# Altium PCB ap-pam-VX.PcbDoc (part 1 of 2)
Units mm, origin at the board's own origin, x right, y up, seen from the top; angles counter-clockwise.
Board outline 190.5 x 50.8 mm, 2 copper layers (Top Layer, Bottom Layer), stack 0.579 mm thick; 74 components, 43 nets, 478 pads, 486 vias.
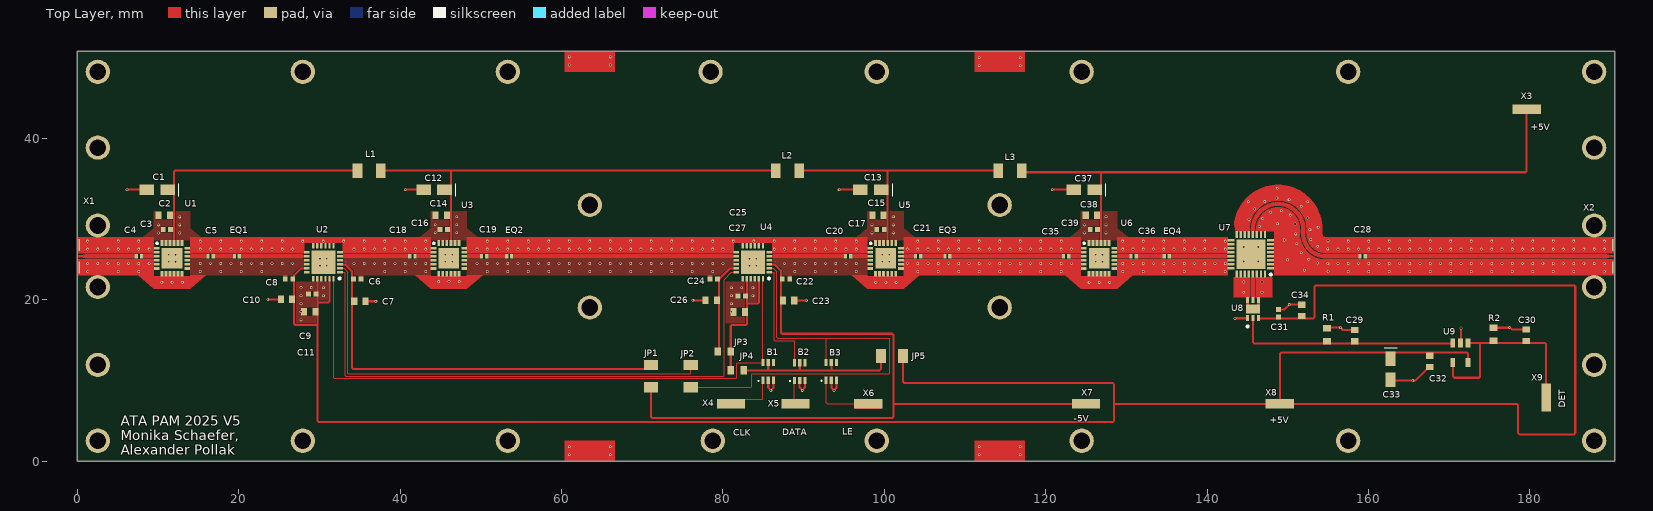
[diagram p0: Top Layer view]
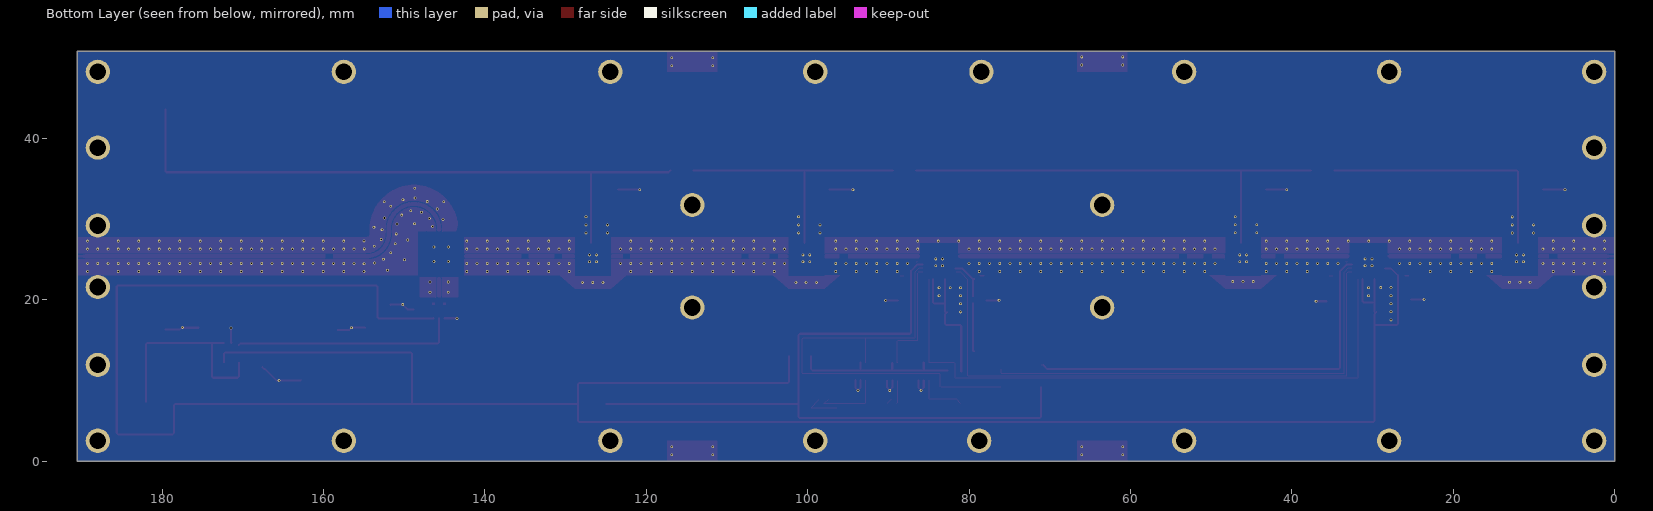
[diagram p1: Bottom Layer view, seen from below]
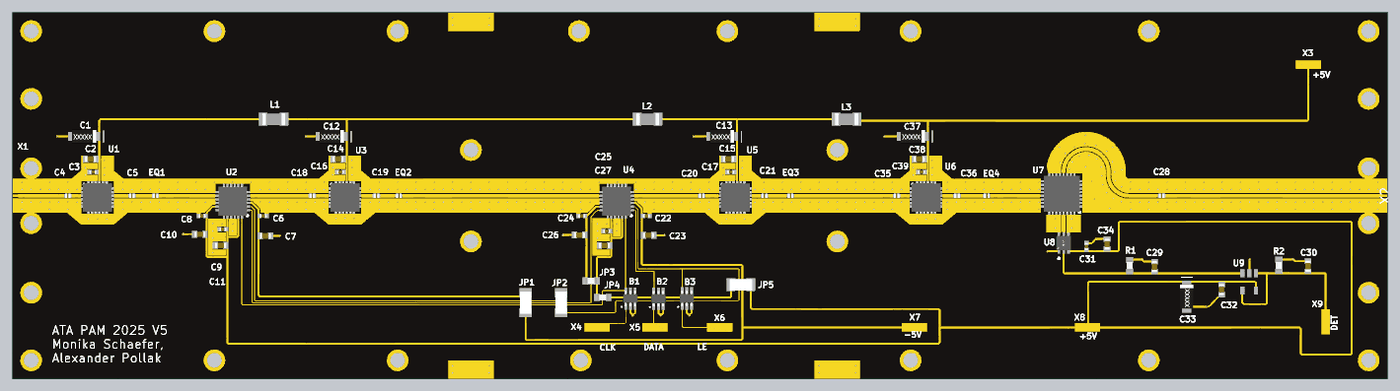
[diagram p2: 3D render of the assembled board from above, using the file's embedded part models]

## Layer stack, top to bottom
Top Layer: signal copper 0.0356
Dielectric 1: dielectric 0.508, Rogers 4350B, Dk 3.48
Bottom Layer: signal copper 0.0356

## Board outline
0,0 190.5,0 190.5,50.8 0,50.8

## Design rules (kind name [scope] priority, off if disabled: settings)
Clearance Clearance_1 [All] p1: gap=0.1 ignorepadtopadclearanceinfootprint=FALSE except(0.2: Via-Hole)
HoleSize [All] p1: absolutevalues=TRUE maxlimit=2.54 minlimit=0.2 maxpercent=80.000 minpercent=20.000
HoleToHoleClearance [All] p1: gap=0.2 allowstackedmicrovias=TRUE
MinimumSolderMaskSliver [All] p1: minsoldermaskwidth=0.1
PolygonConnect [All] p1: connectstyle=Direct reliefconductorwidth=0.254 reliefentries=4 polygonreliefangle="90 Angle" airgapwidth=0.254
RoutingVias [All] p1: holewidth=0.711 width=1.27 viastyle="Through Hole" minholewidth=0.2 minwidth=0.35 maxholewidth=0.711 maxwidth=1.27
SilkToSolderMaskClearance [IsPad] p1: minsilkscreentomaskgap=0.15 clearancetoexposedcopper=TRUE
SolderMaskExpansion [All] p1: expansion=0.102 istentingtop=FALSE
SupplyNets "Schematic Supply Nets" [InNet('GND')] p1: voltage=0.000
Width [All] p1: maxlimit=3 minlimit=0.1 preferedwidth=0.16
26 further rules are at their usual default settings.

## Components (designator, comment, footprint, x,y, rotation, side; value= is the part's Value field where it differs from the comment)
B1 "SN74LVC2G34MDCKREP" BUF_SN74LVC2G34MDCKREP 85.613,11.127 r90 top
B2 "SN74LVC2G34MDCKREP" BUF_SN74LVC2G34MDCKREP 89.508,11.103 r90 top
B3 "SN74LVC2G34MDCKREP" BUF_SN74LVC2G34MDCKREP 93.435,11.134 r90 top
C1 "4.7 uF" C4_7UF 9.881,33.645 r180 top value=4.7uF
C2 "1000 pF" C1000PF 10.786,30.49 r180 top value=1nF
C3 "100 pF" C100PF 11.101,28.71 r180 top
C4 "10nF" C10NF 7.62,25.4 r0 top
C5 "10nF" C10NF 16.51,25.4 r0 top
C6 "100 pF" C100PF 34.699,22.606 r0 top
C7 "1000 pF" C1000PF 35.013,19.823 r0 top value=1nF
C8 "100 pF" C100PF 26.233,22.602 r180 top
C9 "100 pF" C100PF 29.115,20.74 r180 top
C10 "1000 pF" C1000PF 25.922,20.048 r180 top value=1nF
C11 "1000 pF" C1000PF 28.8,18.514 r180 top value=1nF
C12 "4.7 uF" C4_7UF 44.2,33.645 r180 top value=4.7uF
C13 "4.7 uF" C4_7UF 98.34,33.645 r180 top value=4.7uF
C14 "1000 pF" C1000PF 45.087,30.49 r180 top value=1nF
C15 "1000 pF" C1000PF 99.212,30.49 r180 top value=1nF
C16 "100 pF" C100PF 45.402,28.71 r180 top
C17 "100 pF" C100PF 99.527,28.71 r180 top
C18 "10nF" C10NF 41.504,25.4 r0 top
C19 "10nF" C10NF 50.402,25.4 r0 top
C20 "10nF" C10NF 95.509,25.4 r0 top
C21 "10nF" C10NF 104.198,25.4 r0 top
C22 "100 pF" C100PF 87.819,22.603 r0 top
C23 "1000 pF" C1000PF 88.14,19.914 r0 top value=1nF
C24 "100 pF" C100PF 78.867,22.606 r180 top
C25 "100 pF" C100PF 82.328,20.488 r180 top
C26 "1000 pF" C1000PF 78.561,19.942 r180 top value=1nF
C27 "1000 pF" C1000PF 82.012,18.497 r180 top value=1nF
C28 "10nF" C10NF 159.268,25.4 r0 top
C29 "100nF" C1000PF__C100NF 158.277,15.569 r90 top
C30 "100nF" C1000PF__C100NF 179.551,15.607 r90 top
C31 "100 pF" C100PF 148.826,18.351 r270 top
C32 "100nF" C1000PF__C100NF 167.581,12.37 r90 top
C33 "4.7 uF" C4_7UF 162.725,11.392 r270 top value=4.7uF
C34 "100nF" C1000PF__C100NF 151.701,18.69 r270 top
C35 "10nF" C10NF 122.527,25.4 r0 top
C36 "10nF" C10NF 130.89,25.4 r0 top
C37 "4.7 uF" C4_7UF 124.772,33.645 r180 top value=4.7uF
C38 "1000 pF" C1000PF__C100NF 125.657,30.49 r180 top value=1nF
C39 "100 pF" C100PF 125.971,28.71 r180 top
EQ1 "AEQ05472-10" EQ_AEQ05472 19.767,25.4 r0 top
EQ2 "AEQ05472-10" EQ_AEQ05472 53.507,25.4 r0 top
EQ3 "AEQ05472-10" EQ_AEQ05472 107.809,25.4 r0 top
EQ4 "AEQ05472-10" EQ_AEQ05472 134.998,25.4 r0 top
JP1 "MCA12060Z0000ZP500" JP_MCA12060Z0000ZP500 71.084,10.549 r90 top value=0R
JP2 "MCA12060Z0000ZP500" JP_MCA12060Z0000ZP500 76.006,10.549 r90 top value=0R
JP3 "MCT06030Z0000ZP500" JP_small_MCT06030Z0000ZP500 80.162,13.574 r180 top value=0R
JP4 "MCT06030Z0000ZP500" JP_small_MCT06030Z0000ZP500 81.779,11.276 r180 top value=0R
JP5 "MCA12060Z0000ZP500" JP_MCA12060Z0000ZP500 100.943,13.039 r0 top value=0R
L1 "HZ1206E152R-10" FB_HZ1206E152R-10 36.166,36.025 r0 top
L2 "HZ1206E152R-10" FB_HZ1206E152R-10 88.006,36.025 r0 top
L3 "HZ1206E152R-10" FB_HZ1206E152R-10 115.579,36.025 r0 top
R1 "1kOhm" JP_R_MCT06030Z0000ZP500 154.827,15.694 r90 top value=1kR
R2 "1kOhm" JP_R_MCT06030Z0000ZP500 175.506,15.74 r90 top value=1kR
U1 "MML098GQ4A" AMP_MML098GQ4A 11.735,25.15 r0 top
U2 "HMC1018ALP4E" ATT_HMC101018ALPE 30.499,24.65 r180 top
U3 "MML098GQ4A" AMP_MML098GQ4A 46.038,25.15 r0 top
U4 "HMC1018ALP4E" ATT_HMC101018ALPE 83.711,24.65 r180 top
U5 "MML098GQ4A" AMP_MML098GQ4A 100.163,25.15 r0 top
U6 "MML098GQ4A" AMP_MML098GQ4A 126.607,25.15 r0 top
U7 "PS_EP2RKU+" PS_EP2RKU+ 145.42,25.65 r180 top
U8 "ADL6010" DET_ADL6010ACPZN-R2 145.67,18.856 r90 top
U9 "AD8065" OPAMP_AD8065ARTZ-REEL7 171.389,13.447 r270 top
X1 "CPW Solder Pad" "CPW EDGE CONNECTOR" 0.25,25.4 r90 top
X2 "CPW Solder Pad" "CPW EDGE CONNECTOR" 190.25,25.4 r270 top
X3 "Solder Pad" "SOLDER PAD" 179.597,43.6 r90 top
X4 "Solder Pad" "SOLDER PAD" 81,7.144 r90 top
X5 "Solder Pad" "SOLDER PAD" 89,7.144 r90 top
X6 "Solder Pad" "SOLDER PAD" 98,7.144 r90 top
X7 "Solder Pad" "SOLDER PAD" 125,7.144 r90 top
X8 "Solder Pad" "SOLDER PAD" 149,7.144 r90 top
X9 "Solder Pad" "SOLDER PAD" 182.007,7.9 r0 top

## Footprints (in the part's own frame and the unit in brackets; to place one, negate y for a bottom-side part, rotate by r counter-clockwise, add the part's x,y. Pads: shape width x height; smd on the part's side, far side on the other; paste and mask are expansions set on the pad)
AMP_MML098GQ4A [mm]
  rect 0.7x0.35 smd: 1(-1.9,1.25) 2(-1.9,0.75) 3(-1.9,0.25) 4(-1.9,-0.25) 5(-1.9,-0.75) 6(-1.9,-1.25) 13(1.9,-1.25) 14(1.9,-0.75) 15(1.9,-0.25) 16(1.9,0.25) 17(1.9,0.75) 18(1.9,1.25)
  rect 0.7x0.35 on Top Paste: 1(-1.9,1.25) 2(-1.9,0.75) 3(-1.9,0.25) 4(-1.9,-0.25) 5(-1.9,-0.75) 6(-1.9,-1.25) 13(1.9,-1.25) 14(1.9,-0.75) 15(1.9,-0.25) 16(1.9,0.25) 17(1.9,0.75) 18(1.9,1.25)
  rect 0.35x0.7 smd: 7(-1.25,-1.9) 8(-0.75,-1.9) 9(-0.25,-1.9) 10(0.25,-1.9) 11(0.75,-1.9) 12(1.25,-1.9) 19(1.25,1.9) 20(0.75,1.9) 21(0.25,1.9) 22(-0.25,1.9) 23(-0.75,1.9) 24(-1.25,1.9)
  rect 0.35x0.7 on Top Paste: 7(-1.25,-1.9) 8(-0.75,-1.9) 9(-0.25,-1.9) 10(0.25,-1.9) 11(0.75,-1.9) 12(1.25,-1.9) 19(1.25,1.9) 20(0.75,1.9) 21(0.25,1.9) 22(-0.25,1.9) 23(-0.75,1.9) 24(-1.25,1.9)
  rect 2.55x2.55 smd: 25(0,0)
  rect 2.5x2.5 on Top Paste: 25(0,0)
  silkscreen extent -1.96,1.74 -1.76,1.94, body extent -2.05,-2.05 2.05,2.05, height 1.05
ATT_HMC101018ALPE [mm]
  rect 0.7x0.3 smd: 1(-2.05,1.25) 2(-2.05,0.75) 3(-2.05,0.25) 4(-2.05,-0.25) 5(-2.05,-0.75) 6(-2.05,-1.25) 13(2.05,-1.25) 14(2.05,-0.75) 15(2.05,-0.25) 16(2.05,0.25) 17(2.05,0.75) 18(2.05,1.25)
  rect 0.3x0.7 smd: 7(-1.25,-2.05) 8(-0.75,-2.05) 9(-0.25,-2.05) 10(0.25,-2.05) 11(0.75,-2.05) 12(1.25,-2.05) 19(1.25,2.05) 20(0.75,2.05) 21(0.25,2.05) 22(-0.25,2.05) 23(-0.75,2.05) 24(-1.25,2.05)
  rect 2.95x2.95 smd: 25(0,0)
  silkscreen extent -2.13,1.88 -1.88,2.12, body extent -2.05,-2.05 2.05,2.05, height 1
BUF_SN74LVC2G34MDCKREP [mm]
  rect 0.9x0.4 smd: 1(-1.1,0.65) 2(-1.1,0) 3(-1.1,-0.65) 4(1.1,-0.65) 5(1.1,0) 6(1.1,0.65)
  rect 0.9x0.4 on Top Paste: 1(-1.1,0.65) 2(-1.1,0) 3(-1.1,-0.65) 4(1.1,-0.65) 5(1.1,0) 6(1.1,0.65)
  silkscreen extent -1.16,1.2 -1.16,1.21, body extent -1.05,-1 1.05,1, height 1
C4_7UF [mm]
  rect 1.8x1.25 smd: 1(-1.3,0) 2(1.3,0)
  silkscreen extent -2.69,-0.76 -2.69,0.82, body extent -1.7,-0.95 1.7,0.95, height 1.84
C10NF [mm]
  rect 0.4x0.538 smd: 1(-0.325,0) 2(0.325,0)
  body extent -0.4,-0.3 0.4,0.3, height 0.14
C100PF [mm]
  rect 0.6x0.62 smd: 1(-0.46,0) 2(0.46,0)
  body extent -0.5,-0.25 0.5,0.25, height 0.55
C1000PF [mm]
  rect 0.75x0.94 smd: 1(-0.7,0) 2(0.7,0)
  body extent -0.8,-0.4 0.8,0.4, height 0.9
C1000PF__C100NF [mm]
  rect 0.75x0.94 smd: 1(-0.7,0) 2(0.7,0)
  body extent -0.8,-0.4 0.8,0.4, height 0.9
"CPW EDGE CONNECTOR" [mm]
  rect 0.1x0.2 smd paste-2539.97: 1(0,0)
  rect 1.5x0.2 smd paste-2539.97: 2(-1.4,0) 3(1.4,0)
  Top Layer region: -2.383,0.25 -0.361,0.25 -0.361,-0.25 -0.383,-0.75 -2.383,-0.75
  Top Layer region: 2.383,0.25 0.361,0.25 0.361,-0.25 0.383,-0.75 2.383,-0.75
  Top Layer region: -0.15,0.25 0.15,0.25 0.15,-0.25 0.269,-0.75 -0.269,-0.75 -0.15,-0.25
DET_ADL6010ACPZN-R2 [mm]
  rect 0.73x0.35 smd paste+0 mask+0: 1(-1.115,0.675) 2(-1.115,0) 3(-1.115,-0.675) 4(1.115,-0.675) 5(1.115,0) 6(1.115,0.675)
  rect 1.1x1.7 smd paste+0 mask+0: 7(0,0)
  Top Layer region: 0.516,0.5 0.814,0.5 0.814,0.85 0.516,0.85
  Top Layer region: 0.502,-0.85 0.793,-0.85 0.793,-0.5 0.502,-0.5
  silkscreen extent -2.27,0.52 -2.03,0.77, body extent -1.68,-1.15 1.68,1.15, height 0.25
EQ_AEQ05472 [mm]
  rect 0.4x0.538 smd: 1(-0.3,0) 2(0.3,0)
  body extent -0.4,-0.3 0.4,0.3, height 0.14
FB_HZ1206E152R-10 [mm]
  rect 1.2x1.8 smd: 1(-1.45,0) 2(1.45,0)
  body extent -1.6,-0.8 1.6,0.8, height 1.3
JP_MCA12060Z0000ZP500 [mm]
  rect 1.256x1.758 smd paste+0 mask+0: 1(-1.376,0) 2(1.376,0)
  body extent -2.26,-1.13 2.25,1.13, height 0.25
JP_R_MCT06030Z0000ZP500 [mm]
  rect 0.8x1 smd: 1(-0.8,0) 2(0.8,0)
  body extent -0.77,-0.43 0.78,0.42, height 0.46
JP_small_MCT06030Z0000ZP500 [mm]
  rect 0.8x1 smd: 1(-0.8,0) 2(0.8,0)
  body extent -0.77,-0.43 0.78,0.42, height 0.46
OPAMP_AD8065ARTZ-REEL7 [mm] "SOT-23, 5-Leads, Body 2.9x1.6mm, Pitch 0.95mm, IPC Medium Density"
  rect 1.1x0.6 smd: 1(-1.2,0.95) 2(-1.2,0) 3(-1.2,-0.95) 4(1.2,-0.95) 5(1.2,0.95)
  body extent -0.85,-1.5 0.85,1.5, height 1.45
PS_EP2RKU+ [mm]
  rect 0.85x0.3 smd: 1(-2.45,1.75) 2(-2.45,1.25) 3(-2.45,0.75) 4(-2.45,0.25) 5(-2.45,-0.25) 6(-2.45,-0.75) 7(-2.45,-1.25) 8(-2.45,-1.75) 17(2.45,-1.75) 18(2.45,-1.25) 19(2.45,-0.75) 20(2.45,-0.25) 21(2.45,0.25) 22(2.45,0.75) 23(2.45,1.25) 24(2.45,1.75)
  rect 0.3x0.85 smd: 9(-1.75,-2.45) 10(-1.25,-2.45) 11(-0.75,-2.45) 12(-0.25,-2.45) 13(0.25,-2.45) 14(0.75,-2.45) 15(1.25,-2.45) 16(1.75,-2.45) 25(1.75,2.45) 26(1.25,2.45) 27(0.75,2.45) 28(0.25,2.45) 29(-0.25,2.45) 30(-0.75,2.45) 31(-1.25,2.45) 32(-1.75,2.45)
  rect 3.6x3.6 smd: 33(0,0)
  silkscreen extent -2.59,2.4 -2.34,2.65, body extent -2.55,-2.55 2.55,2.55, height 1
"SOLDER PAD" [mm]
  rect 1.2x3.5 smd paste-2539.97: 1(0,0)

## Part data
B1 B2 B3: library part Buf_SN74LVC2G34MDCKREP, "Enhanced Product Dual Buffer Gate", Manufacturer_Name="Texas Instruments", Mouser Part Number=595-SN74L2G34MDCKREP, Datasheet Link=https://datasheet.datasheetarchive.com/originals/distributors/Datasheets-SFU2/DSASFU100028688.pdf, Geometry.Height=1.1mm, Manufacturer Part Number=SN74LVC2G34MDCKREP, Mouser Price/Stock=https://www.mouser.co.uk/ProductDetail/Texas-Instruments/SN74LVC2G34MDCKREP?qs=l4wu3mKjyfmQ87%252BWHVxJDg%3D%3D
C1 C12 C13 C33 C37: library part C7_4uF_TH3A475K010C2900, "Tantalum Capacitor, Polarized, Tantalum (dry/solid), 10V, 10% +Tol, 10% -Tol, 4.7uF, Surface Mount, 1306", Capacitor Type=Tantalum, Case/Package=1206, ESR (Equivalent Series Resistance)=2.9R, Leakage Current=500nA, Manufacturer="Vishay Sprague", Manufacturer Part Number=TH3A475K010C2900, Max Operating Temperature=150°C, Min Operating Temperature=-55°C, Package Shape=Rectangular, Package Style=SMTMeter, Rated DC Voltage (URdc)=10V, Ripple Current=160mA, Supplier Part Number=4924098, Tolerance  (fill in as +-)=10%, Category="Tantalum Capacitors", ComponentLink1Description=https://datasheet.ciiva.com:443/pdfs/VipMasterIC/IC/VISH/VISH-S-A0010085390/VISH-S-A0010085390-1.pdf?src-supplier=IHS+Markit, ComponentLink1URL=https://datasheet.ciiva.com:443/pdfs/VipMasterIC/IC/VISH/VISH-S-A0010085390/VISH-S-A0010085390-1.pdf?src-supplier=IHS+Markit, ComponentLink2Description=https://datasheet.ciiva.com/268/th3-268785.pdf?src-supplier=Digikey, ComponentLink2URL=https://datasheet.ciiva.com/268/th3-268785.pdf?src-supplier=Digikey, ComponentLink3Description=https://datasheet.ciiva.com/16360/th3-16360891.pdf?src-supplier=Future+Electronics, ComponentLink3URL=https://datasheet.ciiva.com/16360/th3-16360891.pdf?src-supplier=Future+Electronics, Dielectric Material=Tantalum, Height=1.6mm, JESD-609 Code=e3, Length=3.2mm, Mounting Technology="Surface Mount", Packaging="Tape and Reel", Pins=2, Polarity=Polarized, Pricing="2000=0.178, 4000=0.175, 6000=0.173, 8000=0.171, 10000=0.166 (USD)", Reach SVHC Compliant=Yes, Reference Standard=AEC-Q200, RoHS=Yes, RoHS Compliant=Yes, Stock=2000, Supplier="Future Electronics", Tan Delta=0.06, Terminal Finish=Tin, Termination="J BEND", Tolerance (fill in as +-)=10%, Width=1.6mm
C2 C7 C10 C11 C14 C15 C23 C26 C27: library part GCM1885C1H102FA16D, "Ceramic Capacitor, Multilayer, Ceramic, 50V, 1% +Tol, 1% -Tol, C0G, 30ppm/Cel TC, 0.001uF, Surface Mount, 0603", Capacitor Type=Ceramic, Case/Package=0603, Manufacturer=Murata, Max Operating Temperature=125°C, Min Operating Temperature=-55°C, Package Shape=Rectangular, Rated DC Voltage (URdc)=50V, Supplier Part Number=81-GCM1885C1H102FA6D, Temperature Characteristics Code=C0G, Tolerance  (fill in as +-)=1%, Category="Ceramic Capacitors", ComponentLink1Description=https://datasheet.ciiva.com:443/pdfs/VipMasterIC/IC/MURE/MURE-S-A0004370842/MURE-S-A0004372260-1.pdf?src-supplier=IHS+Markit, ComponentLink1URL=https://datasheet.ciiva.com:443/pdfs/VipMasterIC/IC/MURE/MURE-S-A0004370842/MURE-S-A0004372260-1.pdf?src-supplier=IHS+Markit, Dielectric Material=Ceramic, Manufacturer Part Number=GCM1885C1H102FA16D, Mounting Technology="Surface Mount", Multilayer=Yes, Packaging="Tape and Reel", Pins=2, Pricing="1=0.35, 10=0.229, 50=0.229, 100=0.138, 1000=0.092, 10000=0.074 (USD)", Reach SVHC Compliant=Yes, Reference Standard=AEC-Q200, RoHS=Yes, RoHS Compliant=Yes, Stock=27229, Supplier=Mouser, Termination=Wraparound, Tolerance (fill in as +-)=1%
C3 C6 C8 C9 C16 C17 C22 C24 C25: library part GRM1555C2A101FA01D, "Multilayer Ceramic Capacitors MLCC - SMD/SMT 100 pF 100 VDC 1% 0402 C0G (NP0)", Manufacturer=Murata, Supplier Part Number=81-GRM1555C2A11FA1D, Manufacturer Part Number=GRM1555C2A101FA01D, Pricing="1=0.18, 10=0.119, 50=0.119, 100=0.06, 1000=0.039, 10000=0.035 (USD)", RoHS=No, Stock=21646, Supplier=Mouser
C4 C5 C18 C19 C20 C21 C28 C35 C36: library part C10nF_939113733510, Manufacturer=Murata, Manufacturer Part Number=939113733510, Supplier Part Number=961-939113733510, Pricing="1000=3.63, 10000=3.49 (USD)", RoHS=No, Stock=402, Supplier=Mouser
C29 C30 C32 C34: library part C100nF_GCM188R71C104KA37J, "Ceramic Capacitor, Multilayer, Ceramic, 16V, 10% +Tol, 10% -Tol, X7R, 15% TC, 0.1uF, Surface Mount, 0603", Capacitor Type=Ceramic, Case/Package=0603, Manufacturer=Murata, Manufacturer Part Number=GCM188R71C104KA37J, Max Operating Temperature=125°C, Min Operating Temperature=-55°C, Package Shape=Rectangular, Package Style=SMTMeter, Rated DC Voltage (URdc)=16V, Supplier Part Number=81-GCM188R71C104KA7J, Temperature Characteristics Code=X7R, Tolerance  (fill in as +-)=10%, Category="Ceramic Capacitors", ComponentLink1Description=https://datasheet.ciiva.com:443/pdfs/VipMasterIC/IC/MURE/MURE-S-A0004370842/MURE-S-A0004371613-1.pdf?src-supplier=IHS+Markit, ComponentLink1URL=https://datasheet.ciiva.com:443/pdfs/VipMasterIC/IC/MURE/MURE-S-A0004370842/MURE-S-A0004371613-1.pdf?src-supplier=IHS+Markit, ComponentLink2Description=https://datasheet.ciiva.com/18183/getdatasheetpartid-140967-18183600.pdf?src-supplier=Verical, ComponentLink2URL=https://datasheet.ciiva.com/18183/getdatasheetpartid-140967-18183600.pdf?src-supplier=Verical, ComponentLink3Description=https://datasheet.ciiva.com/29540/product-29540843.pdf?src-supplier=Digikey, ComponentLink3URL=https://datasheet.ciiva.com/29540/product-29540843.pdf?src-supplier=Digikey, ComponentLink4Description=https://datasheet.ciiva.com/29540/product-29540844.pdf?src-supplier=Digikey, ComponentLink4URL=https://datasheet.ciiva.com/29540/product-29540844.pdf?src-supplier=Digikey, ComponentLink5Description=https://datasheet.ciiva.com/29540/product-29540842.pdf?src-supplier=Digikey, ComponentLink5URL=https://datasheet.ciiva.com/29540/product-29540842.pdf?src-supplier=Digikey, Dielectric Material=Ceramic, Height=0.9mm, JESD-609 Code=e3, Length=1.6mm, Mounting Technology="Surface Mount", Multilayer=Yes, Packaging="Tape and Reel", Pins=2, Pricing="1=0.17, 10=0.097, 50=0.097, 100=0.063, 1000=0.044, 10000=0.031 (USD)", Reach SVHC Compliant=Yes, Reference Standard=AEC-Q200, RoHS=Yes, RoHS Compliant=Yes, Stock=1116664, Supplier=Mouser, Terminal Finish=Nickel, Termination=Wraparound, Tolerance (fill in as +-)=10%, Width=0.8mm
C31 C39: library part C100pF_GRM1555C2A101FA01D, "Multilayer Ceramic Capacitors MLCC - SMD/SMT 100 pF 100 VDC 1% 0402 C0G (NP0)", Manufacturer=Murata, Manufacturer Part Number=GRM1555C2A101FA01D, Supplier Part Number=81-GRM1555C2A11FA1D, Pricing="1=0.18, 10=0.119, 50=0.119, 100=0.06, 1000=0.039, 10000=0.035 (USD)", RoHS=No, Stock=21646, Supplier=Mouser
C38: library part C1000pF_GCM1885C1H102FA16D, "Ceramic Capacitor, Multilayer, Ceramic, 50V, 1% +Tol, 1% -Tol, C0G, 30ppm/Cel TC, 0.001uF, Surface Mount, 0603", Capacitor Type=Ceramic, Case/Package=0603, Manufacturer=Murata, Manufacturer Part Number=GCM1885C1H102FA16D, Max Operating Temperature=125°C, Min Operating Temperature=-55°C, Package Shape=Rectangular, Rated DC Voltage (URdc)=50V, Supplier Part Number=81-GCM1885C1H102FA6D, Temperature Characteristics Code=C0G, Tolerance  (fill in as +-)=1%, Category="Ceramic Capacitors", ComponentLink1Description=https://datasheet.ciiva.com:443/pdfs/VipMasterIC/IC/MURE/MURE-S-A0004370842/MURE-S-A0004372260-1.pdf?src-supplier=IHS+Markit, ComponentLink1URL=https://datasheet.ciiva.com:443/pdfs/VipMasterIC/IC/MURE/MURE-S-A0004370842/MURE-S-A0004372260-1.pdf?src-supplier=IHS+Markit, Dielectric Material=Ceramic, Mounting Technology="Surface Mount", Multilayer=Yes, Packaging="Tape and Reel", Pins=2, Pricing="1=0.35, 10=0.229, 50=0.229, 100=0.138, 1000=0.092, 10000=0.074 (USD)", Reach SVHC Compliant=Yes, Reference Standard=AEC-Q200, RoHS=Yes, RoHS Compliant=Yes, Stock=27229, Supplier=Mouser, Termination=Wraparound, Tolerance (fill in as +-)=1%
EQ1 EQ2 EQ3 EQ4: library part EQ_AEQ05472-10, "Rf Filter Gain Equalizer 2SMD", Manufacturer="Knowles Dielectric Labs", Supplier Part Number=1761-1006-ND, ComponentLink1Description=http://www.mouser.com/ds/2/110/Dielectriclaboratories_EW_Series-340573.pdf?src-supplier=Mouser, ComponentLink1URL=http://www.mouser.com/ds/2/110/Dielectriclaboratories_EW_Series-340573.pdf?src-supplier=Mouser, ComponentLink2Description=http://www.knowlescapacitors.com/getattachment/69df7735-7ed2-4c4f-903b-a99acda4fa2d/Gain-Equalizers.aspx?src-supplier=Digikey, ComponentLink2URL=http://www.knowlescapacitors.com/getattachment/69df7735-7ed2-4c4f-903b-a99acda4fa2d/Gain-Equalizers.aspx?src-supplier=Digikey, Manufacturer Part Number=AEQ05472-10, Pricing="10=7.145, 20=6.5195, 30=6.203, 50=5.8498, 70=5.64214, 100=5.4415, 250=5.00556, 500=4.7401, 1000=4.51981 (USD)", RoHS=Yes, Stock=390, Supplier=Digikey
JP1 JP2 JP5: library part JP_MCA12060Z0000ZP500, "Fixed Resistor, Thin Film, 0.25W, 0ohm, Surface Mount, 1206", Case/Package=1206, Manufacturer=Vishay, Max Operating Temperature=125°C, Min Operating Temperature=-55°C, Package Height=0.55mm, Package Length=3.2mm, Package Shape=Rectangular, Package Width=1.6mm, Power=250mW, Rated Temperature=70°C, Resistor Type="FIXED RESISTOR", Supplier Part Number=594-MCA12060Z0000ZP5, Category="Chip SMD Resistors", Construction=Rectangular, JESD-609 Code=e3, Manufacturer Part Number=MCA12060Z0000ZP500, Mounting Technology="Surface Mount", Packaging="Tape and Reel", Pins=2, Pricing="1=0.44, 10=0.318, 50=0.245, 100=0.218, 1000=0.132, 10000=0.117 (USD)", Reach SVHC Compliant=Yes, Reference Standard=CECC40401-801, RoHS=Yes, RoHS Compliant=Yes, Stock=3183, Supplier=Mouser, Technology="THIN FILM", Terminal Finish=Nickel, Termination=Wraparound
JP3 JP4: library part JP_small_MCT06030Z0000ZP500, "Fixed Resistor, Thin Film, 0.1W, 0ohm, Surface Mount, 0603", Case/Package=0603, Manufacturer="Vishay Beyschlag", Max Operating Temperature=125°C, Min Operating Temperature=-55°C, Package Height=0.45mm, Package Length=1.55mm, Package Shape=Rectangular, Package Width=0.85mm, Power=100mW, Rated Temperature=70°C, Resistor Type="FIXED RESISTOR", Supplier Part Number=594-MCT06030Z0000ZP5, Category="Chip SMD Resistors", ComponentLink1Description=https://datasheet.ciiva.com:443/pdfs/VipMasterIC/IC/VISH/VISH-S-A0002473667/VISH-S-A0002473667-1.pdf?src-supplier=IHS+Markit, ComponentLink1URL=https://datasheet.ciiva.com:443/pdfs/VipMasterIC/IC/VISH/VISH-S-A0002473667/VISH-S-A0002473667-1.pdf?src-supplier=IHS+Markit, ComponentLink2Description=https://datasheet.ciiva.com/48524/mc-pro-48524221.pdf?src-supplier=Avnet, ComponentLink2URL=https://datasheet.ciiva.com/48524/mc-pro-48524221.pdf?src-supplier=Avnet, ComponentLink3Description=https://datasheet.ciiva.com/8901/mc-pro-8901833.pdf?src-supplier=Avnet, ComponentLink3URL=https://datasheet.ciiva.com/8901/mc-pro-8901833.pdf?src-supplier=Avnet, ComponentLink4Description=https://datasheet.ciiva.com/8898/mc-pro-8898078.pdf?src-supplier=Avnet, ComponentLink4URL=https://datasheet.ciiva.com/8898/mc-pro-8898078.pdf?src-supplier=Avnet, ComponentLink5Description=https://datasheet.ciiva.com/2471/mc-pro-2471991.pdf?src-supplier=Digikey, ComponentLink5URL=https://datasheet.ciiva.com/2471/mc-pro-2471991.pdf?src-supplier=Digikey, ComponentLink6Description=https://datasheet.ciiva.com/2471/mc-pro-2471992.pdf?src-supplier=Digikey, ComponentLink6URL=https://datasheet.ciiva.com/2471/mc-pro-2471992.pdf?src-supplier=Digikey, ComponentLink7Description=https://datasheet.ciiva.com/2471/mc-pro-2471993.pdf?src-supplier=Digikey, ComponentLink7URL=https://datasheet.ciiva.com/2471/mc-pro-2471993.pdf?src-supplier=Digikey, ComponentLink8Description=https://datasheet.ciiva.com/16451/mc-pro-16451398.pdf?src-supplier=Future+Electronics, ComponentLink8URL=https://datasheet.ciiva.com/16451/mc-pro-16451398.pdf?src-supplier=Future+Electronics, Construction=Rectangular, JESD-609 Code=e3, Manufacturer Part Number=MCT06030Z0000ZP500, Mounting Technology="Surface Mount", Packaging="Tape and Reel", Pins=2, Pricing="1=0.24, 10=0.09, 50=0.09, 100=0.063, 1000=0.04, 10000=0.028 (USD)", Reach SVHC Compliant=Yes, Reference Standard=CECC40401-801, RoHS=Yes, RoHS Compliant=Yes, Stock=102669, Supplier=Mouser, Technology="THIN FILM", Terminal Finish=Nickel, Termination=Wraparound
L1 L2 L3: library part FB_HZ1206E152R-10, "Ferrite Chip, 1 Function(s), 0.5A, 2 Pin(s)", Case Code=1206, Clock Frequency=50MHz, Current Rating=500mA, DC Resistance-Max=300mR, Manufacturer=Laird, Manufacturer Series=HZ1206E152R, Max Operating Temperature=125°C, Min Operating Temperature=-55°C, Supplier Part Number=240-2548-1-ND, Category="Ferrite Beads and Chips", Channels=1, ComponentLink1Description=https://datasheet.ciiva.com:443/pdfs/VipMasterIC/IC/STWD/STWDS00487/STWDS00487-1.pdf?src-supplier=IHS+Markit, ComponentLink1URL=https://datasheet.ciiva.com:443/pdfs/VipMasterIC/IC/STWD/STWDS00487/STWDS00487-1.pdf?src-supplier=IHS+Markit, ComponentLink2Description=https://datasheet.ciiva.com/1013/hz1206e152r-10-b-1013323.pdf?src-supplier=Digikey, ComponentLink2URL=https://datasheet.ciiva.com/1013/hz1206e152r-10-b-1013323.pdf?src-supplier=Digikey, ComponentLink3Description=https://datasheet.ciiva.com/22622/1685976-22622840.pdf?src-supplier=Element14, ComponentLink3URL=https://datasheet.ciiva.com/22622/1685976-22622840.pdf?src-supplier=Element14, ComponentLink4Description=https://datasheet.ciiva.com/12396/hz1206e152r-10new-201540-12396726.pdf?src-supplier=Mouser, ComponentLink4URL=https://datasheet.ciiva.com/12396/hz1206e152r-10new-201540-12396726.pdf?src-supplier=Mouser, Construction="Chip Bead", Filter Type="FERRITE CHIP", Height=1.1mm, JESD-609 Code=e3, Length=3.2mm, Manufacturer Part Number=HZ1206E152R-10, Material=Ferrite, Min Frequency=50MHz, Mounting Technology="Surface Mount", Output Impedance=1.5kR, Packaging="Tape and Reel", Pricing="1=0.24, 10=0.164, 25=0.142, 50=0.127, 100=0.1134, 250=0.09704, 500=0.08584, 1000=0.07554 (USD)", Reach SVHC Compliant=Yes, RoHS=Yes, RoHS Compliant=Yes, Series=HZ1206E152R-10, Stock=35353, Supplier=Digikey, Terminal Finish=Nickel, Width=1.6mm
R1 R2: library part R_1kOhm_MCT06030C1001FPW00, "Fixed Resistor, Thin Film, 0.1W, 1000ohm, 75V, 1% +/-Tol, 50ppm/Cel, Surface Mount, 0603", Case/Package=0603, Manufacturer="Vishay BCcomponents", Manufacturer Part Number=MCT06030C1001FPW00, Max Operating Temperature=125°C, Min Operating Temperature=-55°C, Package Height=0.45mm, Package Length=1.55mm, Package Shape=Rectangular, Package Width=0.85mm, Power=100mW, Rated Temperature=70°C, Resistor Type="FIXED RESISTOR", Supplier Part Number=594-MCT06030C1001FPW, Temperature Coefficient (ppm/Cel)=50, Tolerance=1%, Working Voltage=75V, Category="Chip SMD Resistors", ComponentLink1Description=https://datasheet.ciiva.com:443/pdfs/VipMasterIC/IC/VISH/VISH-S-A0002473667/VISH-S-A0002473667-1.pdf?src-supplier=IHS+Markit, ComponentLink1URL=https://datasheet.ciiva.com:443/pdfs/VipMasterIC/IC/VISH/VISH-S-A0002473667/VISH-S-A0002473667-1.pdf?src-supplier=IHS+Markit, ComponentLink2Description=http://components.arrow.com/part/dataview/43585914S9217422N4052?src-supplier=Arrow+Electronics, ComponentLink2URL=http://components.arrow.com/part/dataview/43585914S9217422N4052?src-supplier=Arrow+Electronics, ComponentLink3Description=https://datasheet.octopart.com/MCT06030C1001FPW00-Vishay-datasheet-81842982.pdf?src-supplier=Future+Electronics, ComponentLink3URL=https://datasheet.octopart.com/MCT06030C1001FPW00-Vishay-datasheet-81842982.pdf?src-supplier=Future+Electronics, Construction=Rectangular, JESD-609 Code=e3, Mounting Technology="Surface Mount", Packaging="Tape and Reel", Pins=2, Pricing="1=0.1, 10=0.039, 50=0.039, 100=0.035, 1000=0.021, 10000=0.014 (USD)", Reach SVHC Compliant=Yes, Reference Standard=CECC40401-801, RoHS=Yes, RoHS Compliant=Yes, Stock=43742, Supplier=Mouser, Technology="THIN FILM", Terminal Finish=Nickel, Termination=Wraparound
U1 U3 U5 U6: library part amp_MML098GQ4A, "Low Noise Amplifier / Low current consumption / Low noise figure / Pb-free RoHS compliant QFN package / Ultra wideband performance / Positive bias / Ready for Space Qualification", Current (mA)=57, Frequency (GHz)=0.05-20.00, Voltage (VDC)=5.0, Gain (dB)=23.00, Manufacturer Part Number=MML098GQ4A, Noise Figure (dB)=2.3, Output P1dB (dBm)=12.00
U2 U4: library part Att_HMC1018ALP4E, "Attenuators Attenuators", Manufacturer_Name="Analog Devices", Mouser Part Number=584-HMC1018ALP4E, Datasheet Link=https://www.analog.com/media/en/technical-documentation/data-sheets/hmc1018a.pdf, Geometry.Height=1mm, Manufacturer Part Number=HMC1018ALP4E, Mouser Price/Stock=https://www.mouser.co.uk/ProductDetail/Analog-Devices/HMC1018ALP4E?qs=XflvcvBPbgW0VxFFfcxVBA%3D%3D
U7: "Splitter And Combiner", Manufacturer=Mini-Circuits, Manufacturer Part Number=EP2RKU+, Supplier Part Number=3157-EP2RKU+CT-ND, Category="RF Semiconductors and Devices", Pricing="1=33.39, 20=30.288, 50=29.1842, 100=28.9081, 200=27.99605 (USD)", RoHS=Yes, RoHS Compliant=Yes, Stock=2184, Supplier=Digikey
U8: library part det_ADL6010ACPZN-R2, "Linear Detector, 500MHz Min, 43500MHz Max, 20dBm Input Power-Max", Manufacturer="Analog Devices", Manufacturer Part Number=ADL6010ACPZN-R2, Supplier Part Number=584-ADL6010ACPZN-R2, Category="RF Semiconductors and Devices", ComponentLink1Description=https://datasheet.ciiva.com:443/pdfs/VipMasterIC/IC/ANDI/ANDI-S-A0008998713/ANDI-S-A0008998713-1.pdf?src-supplier=IHS+Markit, ComponentLink1URL=https://datasheet.ciiva.com:443/pdfs/VipMasterIC/IC/ANDI/ANDI-S-A0008998713/ANDI-S-A0008998713-1.pdf?src-supplier=IHS+Markit, ComponentLink2Description=https://datasheet.ciiva.com/29985/adl6010-29985760.pdf?src-supplier=Avnet, ComponentLink2URL=https://datasheet.ciiva.com/29985/adl6010-29985760.pdf?src-supplier=Avnet, Pricing="1=162.98, 10=153.49, 50=153.49, 100=153.49, 1000=153.49, 10000=153.49 (USD)", Reach SVHC Compliant=Yes, RF/Microwave Device Type="LINEAR DETECTOR", RoHS=Yes, RoHS Compliant=Yes, Stock=808, Supplier=Mouser
U9: library part opAmp_AD8065ARTZ-REEL7, "Operational Amplifier, 1 Func, BIPolar, PDSO5", Case/Package=LSSOP, Manufacturer="Analog Devices", Manufacturer Part Number=AD8065ARTZ-REEL7, Max Operating Temperature=85°C, Max Supply Voltage=12V, Min Operating Temperature=-40°C, Min Supply Voltage=2.5V, Package Body Material=Plastic, Package Shape=Rectangular, Package Style="SMALL OUTLINE, LOW PROFILE, SHRINK PITCHMeter", Peak Reflow Temperature (Cel)=260°C, Supplier Part Number=584-AD8065ARTZ-R7, Temperature Grade=INDUSTRIAL, Time @ Peak Reflow Temperature-Max (s)=40s, Bandwidth-Nom=145MHz, Category="Amplifiers - Op Amps, Buffer, Instrumentation", Channels=1, ComponentLink1Description=https://datasheet.ciiva.com:443/pdfs/VipMasterIC/IC/ANDI/ANDI-S-A0007455537/ANDI-S-A0007455537-1.pdf?src-supplier=IHS+Markit, ComponentLink1URL=https://datasheet.ciiva.com:443/pdfs/VipMasterIC/IC/ANDI/ANDI-S-A0007455537/ANDI-S-A0007455537-1.pdf?src-supplier=IHS+Markit, ComponentLink2Description=https://datasheet.ciiva.com/1794/ad8065-8066-1794192.pdf?src-supplier=Digikey, ComponentLink2URL=https://datasheet.ciiva.com/1794/ad8065-8066-1794192.pdf?src-supplier=Digikey, ComponentLink3Description=https://datasheet.ciiva.com/46387/1906158-46387195.pdf?src-supplier=Element14, ComponentLink3URL=https://datasheet.ciiva.com/46387/1906158-46387195.pdf?src-supplier=Element14, ComponentLink4Description=https://datasheet.ciiva.com/8078/1906158-8078715.pdf?src-supplier=Element14, ComponentLink4URL=https://datasheet.ciiva.com/8078/1906158-8078715.pdf?src-supplier=Element14, ComponentLink5Description=https://datasheet.ciiva.com/28388/1906158-28388634.pdf?src-supplier=Element14, ComponentLink5URL=https://datasheet.ciiva.com/28388/1906158-28388634.pdf?src-supplier=Element14, ComponentLink6Description=https://datasheet.ciiva.com/1794/ad8065-8066-1794191.pdf?src-supplier=Digikey, ComponentLink6URL=https://datasheet.ciiva.com/1794/ad8065-8066-1794191.pdf?src-supplier=Digikey, ComponentLink7Description=https://datasheet.ciiva.com/1794/ad8065-8066-1794193.pdf?src-supplier=Digikey, ComponentLink7URL=https://datasheet.ciiva.com/1794/ad8065-8066-1794193.pdf?src-supplier=Digikey, ComponentLink8Description=https://datasheet.ciiva.com/2972/ad8065-8066-2972973.pdf?src-supplier=Avnet, ComponentLink8URL=https://datasheet.ciiva.com/2972/ad8065-8066-2972973.pdf?src-supplier=Avnet, ComponentLink9Description=https://datasheet.ciiva.com/15410/ad8065-8066-246489-15410250.pdf?src-supplier=Mouser, ComponentLink9URL=https://datasheet.ciiva.com/15410/ad8065-8066-246489-15410250.pdf?src-supplier=Mouser, ComponentLink10Description=https://datasheet.ciiva.com/48709/001248924-da-01-en-ic-opamp-v-ad8065artz-reel7-sot-23-5-adi-48709574.pdf?src-supplier=Conrad, ComponentLink10URL=https://datasheet.ciiva.com/48709/001248924-da-01-en-ic-opamp-v-ad8065artz-reel7-sot-23-5-adi-48709574.pdf?src-supplier=Conrad, Consumer IC Type="VIDEO AMPLIFIER", Height - Seated (Max)=1.45mm, JESD-30 Code=R-PDSO-G5, JESD-609 Code=e3, Length=2.9mm, Moisture Sensitivity Level=1, Number of Channels=1, Pins=5, Pricing="1=6.36, 10=3.77, 50=3.77, 100=3.13, 1000=2.6, 10000=2.59 (USD)", Qualification Status="Not Qualified", Reach SVHC Compliant=Yes, RoHS=Yes, RoHS Compliant=Yes, Stock=85532, Supplier=Mouser, Surface Mount=Yes, Technology=BIPOLAR, Terminal Finish=Tin, Terminal Form="Gull Wing", Terminal Pitch=0.95mm, Terminal Position=DUAL, Width=1.6mm
X1 X2: library part "RF  CPW Solder Pad", "Solder pad for RF Coplanar Waveguide Rogers 4350B Thickness 0.020\" Copper 1oz"
X3 X4 X5 X6 X7 X8 X9: "Pad to solder wires to"

## Free pads (board coordinates)
  round 3 hole 2.05 mask-2539.97: 1(2.54,2.54) 2(27.94,2.54) 3(53.34,2.54) 4(78.74,2.54) 5(99.06,2.54) 6(124.46,2.54) 7(157.48,2.54) 8(187.96,2.54) 9(187.96,48.26) 10(157.48,48.26) 11(124.46,48.26) 12(99.06,48.26) 13(78.47,48.26) 14(53.34,48.26) 15(27.94,48.26) 16(2.54,48.26) 17(2.54,38.862) 18(2.54,29.21) 19(2.54,21.59) 20(2.54,11.938) 21(187.96,38.862) 22(187.96,29.21) 23(187.96,21.59) 24(187.96,11.938) 25(63.5,31.75) 26(114.3,31.75) 27(114.3,19.05) 28(63.5,19.05)

## Via types
v1: diameter 0.35, hole 0.2, Top Layer to Bottom Layer, 486 vias

## Nets (pads, with @x,y where several pads share a name; then routed paths per layer and width w, separated by ;. In a path a pad name is that pad's centre, name@x,y a point inside that pad or via, vN(x,y) a via of type N, cw(c..) or ccw(c..) an arc to the next point about the centre after c; other vN are vias at no path point)
+5V_JP3: C24.1 C26.1 JP3.2 U4.17 | length 11.1
  Top Layer w0.254: C24.1 79.509,22.424 79.509,20.416 ; JP3.2 79.51,13.722 79.51,19.45 ; 79.509,19.451 C26.1@79.509,19.599 ; C24.1@79.509,22.528 80.881,23.9 U4.17
+5V_JP4: C25.1 C27.1 JP3.1 JP4.2 U4.20 U4.23 | length 17.7
  Top Layer w0.254: JP4.2@80.967,11.129 80.967,16.734 81.116,16.883 82.812,16.883 82.961,17.032 82.961,18.005 82.96,18.006 82.96,18.249 C27.1 ; C27.1@82.961,18.497 82.961,19.548 82.961,20.488 U4.20 ; 83.079,19.548 84.312,19.548 84.461,19.697 U4.23
+5V_JP5: B1.5@85.613,12.227 B2.5@89.508,12.203 B3.5@93.435,12.234 JP4.1 JP5.1 | length 21.3
  Top Layer w0.254: JP4.1@82.684,11.264 85.613,11.264 89.521,11.264 ; 85.613,11.279 B1.5@85.613,12.227 ; B2.5@89.521,12.19 89.521,11.264 ; 93.435,11.413 B3.5@93.435,12.234 ; JP5.1 99.567,11.413 99.418,11.264 89.521,11.264
+5V_L1: C1.1 C2.1 C3.1 L1.1 U1.21@11.985,27.05 | length 31.6
  Top Layer w0.254: U1.21@11.985,27.05 11.985,35.876 12.134,36.025 28.126,36.025 L1.1
+5V_L2: C12.1 C14.1 C16.1 L1.2 L2.1 U3.21@46.288,27.05 | length 57.9
  Top Layer w0.254: L1.2 L2.1 ; U3.21@46.288,27.05 46.288,33.645 46.288,35.981
+5V_L3: C13.1 C15.1 C17.1 L2.2 L3.1 U5.21@100.413,27.05 | length 33.7
  Top Layer w0.254: L2.2 89.466,36.035 100.413,36.035 ; U5.21@100.413,27.05 100.413,36.035 ; L3.1 100.423,36.025 100.413,36.035
+5V_X3: C37.1 C38.1 C39.1 L3.2 U6.21@126.857,27.05 X3.1 | length 79.1
  Top Layer w0.254: L3.2 117.247,35.808 179.448,35.808 179.597,35.957 X3.1 ; U6.21@126.857,27.05 126.857,28.71 126.857,35.784
+5V_X8: C8.1 C9.1 C10.1 C11.1 C31.2 C32.2 C33.1 C34.2 JP5.2 U2.17 U2.20 U2.23 U8.3 U9.5 X8.1 | length 318.7
  Top Layer w0.254: U2.17 27.725,23.9 26.87,23.045 26.87,22.602 26.87,20.048 26.87,17.028 27.019,16.879 29.747,16.879 ; C11.1 29.747,18.267 29.747,16.879 ; C11.1@29.749,18.514 29.749,19.693 ; U2.20 29.749,20.74 29.749,19.693 ; U2.23 31.249,19.842 31.1,19.693 29.749,19.693 ; JP5.2 102.319,9.817 102.468,9.668 128.328,9.668 128.477,9.519 128.477,7.083 ; U8.3 146.373,17.713 148.826,17.713 151.701,17.713 153.158,17.713 153.307,17.861 153.307,21.635 153.456,21.784 185.466,21.784 185.615,21.635 185.615,3.482 185.466,3.333 178.689,3.333 178.54,3.482 178.54,6.934 178.392,7.083 149.525,7.083 149.042,7.083 148.403,7.083 128.477,7.083 ; X8.1@149,7.111 149.042,7.153 149.042,13.324 149.191,13.473 162.755,13.473 163.366,13.473 167.581,13.473 172.19,13.473 172.339,13.324 U9.5 ; 29.747,16.879 29.747,5 29.896,4.852 128.328,4.852 128.477,5 128.477,7.083
-5V: C22.1 C23.1 JP1.1 U4.3 X7.1 | length 91.3
  Top Layer w0.254: JP1.1 71.084,5.511 71.233,5.362 100.977,5.362 101.126,5.511 101.126,7.111 101.126,15.652 100.977,15.801 87.327,15.801 87.178,15.95 87.178,21.384 87.178,22.603 87.178,23.611 86.389,24.4 U4.3 ; 101.151,7.111 X7.1@125,7.111
-5V_JP1: C6.1 C7.1 JP1.2 U2.3 | length 51.1
  Top Layer w0.127: JP1.2@70.833,11.925 JP1.2
  Top Layer w0.254: U2.3 33.168,24.4 34.06,23.508 34.06,22.606 34.06,20.695 34.059,20.694 34.059,11.573 34.208,11.424 70.183,11.424 ; 70.183,11.424 70.332,11.424 JP1.2@70.833,11.925
C4: C4.2 U1.3@9.835,25.4
C5: C5.2 EQ1.1
C18: C18.2 U3.3@44.138,25.4
C19: C19.2 EQ2.1
C20: C20.2 U5.3@98.263,25.4
C21: C21.2 EQ3.1
C35: C35.2 U6.3@124.707,25.4
C36: C36.2 EQ4.1
CLK: B1.1@84.963,10.027 X4.1 | length 6.5
  Top Layer w0.127: X4.1 81.537,7.681 84.87,7.681 84.963,7.773 B1.1@84.963,10.027
CLK_B: B1.6@84.963,12.227 U2.24 U4.24 | length 77.7
  Top Layer w0.127: U2.24 31.749,10.35 31.823,10.276 81.662,10.276 81.736,10.35 81.736,12.153 81.81,12.227 B1.6@84.961,12.227 ; U4.24 B1.6@84.961,12.227 ; B1.6@84.963,12.227 B1.6@84.961,12.227
DATA1: B2.1@88.858,10.003 X5.1 | length 3.7
  Top Layer w0.127: B2.1@88.858,10.003 88.858,7.286 X5.1 ; X5.1@89.636,7.681 X5.1@90.173,7.144
DATA1_B: B2.6@88.858,12.203 U4.1 | length 14.2
  Top Layer w0.127: U4.1 86.279,23.4 86.353,23.326 86.353,14.993 86.427,14.919 88.812,14.919 88.886,14.845 88.886,12.231 B2.6@88.858,12.203
DATA2: U2.1 U4.18 | length 74.2
  Top Layer w0.127: U2.1 33.106,23.4 33.18,23.326 33.18,10.623 33.254,10.549 80.086,10.549 80.16,10.623 80.16,22.51 81.05,23.4 U4.18
Det: C30.1 R2.1 U9.1 U9.4 X9.1 | length 26.3
  Top Layer w0.254: U9.4 170.439,10.56 170.65,10.349 173.689,10.349 173.838,10.498 173.838,14.647 ; U9.1 173.838,14.647 ; X9.1@182.001,7.314 182.001,14.498 181.852,14.647 179.551,14.647 175.506,14.647 173.838,14.647
EQ1: EQ1.2 U2.14
EQ2: EQ2.2 U4.14
EQ3: C35.1 EQ3.2
EQ4: EQ4.2 U7.21
GND: B1.2@85.613,10.027 B1.3@86.263,10.027 B2.2@89.508,10.003 B2.3@90.158,10.003 B3.2@93.435,10.034 B3.3@94.085,10.034 C1.2 C2.2 C3.2 C6.2 C7.2 C8.2 C9.2 C10.2 C11.2 C12.2 C13.2 C14.2 C15.2 C16.2 C17.2 C22.2 C23.2 C24.2 C25.2 C26.2 C27.2 C29.2 C30.2 C31.1 C32.1 C33.2 C34.1 C37.2 C38.2 C39.2 pad.1 pad.2 pad.3 pad.4 pad.5 pad.6 pad.7 pad.8 pad.9 pad.10 pad.11 pad.12 pad.13 pad.14 pad.15 pad.16 pad.17 pad.18 pad.19 pad.20 pad.21 pad.22 pad.23 pad.24 pad.25 pad.26 pad.27 pad.28 R1.2 R2.2 U1.1@9.835,26.4 U1.2@9.835,25.9 U1.4@9.835,24.9 U1.5@9.835,24.4 U1.6@9.835,23.9 U1.7@10.485,23.25 U1.8@10.985,23.25 U1.9@11.485,23.25 U1.10@11.985,23.25 U1.11@12.485,23.25 U1.12@12.985,23.25 U1.13@13.635,23.9 U1.14@13.635,24.4 U1.15@13.635,24.9 U1.17@13.635,25.9 U1.18@13.635,26.4 U1.19@12.985,27.05 U1.20@12.485,27.05 U1.22@11.485,27.05 U1.23@10.985,27.05 U1.24@10.485,27.05 U1.25@11.735,25.15 U2.4 U2.6 U2.7 U2.8 U2.9 U2.10 U2.11 U2.12 U2.13 U2.15 U2.16 U2.19 U2.21 U2.22 U2.25 U3.1@44.138,26.4 U3.2@44.138,25.9 U3.4@44.138,24.9 U3.5@44.138,24.4 U3.6@44.138,23.9 U3.7@44.788,23.25 U3.8@45.288,23.25 U3.9@45.788,23.25 U3.10@46.288,23.25 U3.11@46.788,23.25 U3.12@47.288,23.25 U3.13@47.938,23.9 U3.14@47.938,24.4 U3.15@47.938,24.9 U3.17@47.938,25.9 U3.18@47.938,26.4 U3.19@47.288,27.05 U3.20@46.788,27.05 U3.22@45.788,27.05 U3.23@45.288,27.05 U3.24@44.788,27.05 U3.25@46.038,25.15 U4.4 U4.6 U4.7 U4.8 U4.9 U4.10 U4.11 U4.12 U4.13 U4.15 U4.16 U4.19 U4.21 U4.22 U4.25 U5.1@98.263,26.4 U5.2@98.263,25.9 U5.4@98.263,24.9 U5.5@98.263,24.4 U5.6@98.263,23.9 U5.7@98.913,23.25 U5.8@99.413,23.25 U5.9@99.913,23.25 U5.10@100.413,23.25 U5.11@100.913,23.25 U5.12@101.413,23.25 U5.13@102.063,23.9 U5.14@102.063,24.4 U5.15@102.063,24.9 U5.17@102.063,25.9 U5.18@102.063,26.4 U5.19@101.413,27.05 U5.20@100.913,27.05 U5.22@99.913,27.05 U5.23@99.413,27.05 U5.24@98.913,27.05 U5.25@100.163,25.15 U6.1@124.707,26.4 U6.2@124.707,25.9 U6.4@124.707,24.9 U6.5@124.707,24.4 U6.6@124.707,23.9 U6.7@125.357,23.25 U6.8@125.857,23.25 U6.9@126.357,23.25 U6.10@126.857,23.25 U6.11@127.357,23.25 U6.12@127.857,23.25 U6.13@128.507,23.9 U6.14@128.507,24.4 U6.15@128.507,24.9 U6.17@128.507,25.9 U6.18@128.507,26.4 U6.19@127.857,27.05 U6.20@127.357,27.05 U6.22@126.357,27.05 U6.23@125.857,27.05 U6.24@125.357,27.05 U6.25@126.607,25.15 U7.1 U7.2 U7.3 U7.4 U7.5 U7.6 U7.7 U7.8 U7.9 U7.10 U7.11 U7.13 U7.14 U7.15 U7.16 U7.17 U7.18 U7.19 U7.20 U7.22 U7.23 U7.24 U7.25 U7.26 U7.27 U7.28 U7.30 U7.31 U7.32 U7.33 U8.1 U8.4 U8.6 U8.7 U9.2 X1.2 X1.3 X2.2 X2.3 | length 74.3
  Top Layer w0.2: U7.13@145.199,28.451 cw(c148.788,28.765) 145.237,29.375 ; 146.162,28.535 cw(c148.788,28.765) 146.413,29.911
  Top Layer w0.254: v1(6.156,33.645) C1.2 C1.2@8.856,33.645 ; v1(23.613,20.057) 25.213,20.057 C10.2 ; C7.2 v1(36.999,19.823) ; v1(40.641,33.645) C12.2 C12.2@43.175,33.645 ; 43.318,27.586 43.404,27.586 ; 48.62,27.491 48.62,27.618 ; v1(76.275,19.942) C26.2 ; B1.2@85.613,10.027 85.613,9.14 v1@85.944,8.809 ; v1(85.944,8.783) v1@85.944,8.809 ; B1.3@86.263,10.027 86.263,9.128 v1@85.944,8.809 ; C23.2 v1(90.337,19.914) ; B2.2@89.508,10.003 89.508,9.135 v1@89.834,8.809 ; v1(89.834,8.783) v1@89.834,8.809 ; B2.3@90.158,10.003 90.158,9.133 v1@89.834,8.809 ; B3.2@93.435,10.034 93.435,9.136 v1@93.762,8.809 ; v1(93.762,8.783) v1@93.762,8.809 ; B3.3@94.085,10.034 94.085,9.132 v1@93.762,8.809 ; v1(94.392,33.645) C13.2 C13.2@97.315,33.645 ; v1(120.812,33.645) C37.2 ; v1(143.45,17.699) 143.468,17.718 144.972,17.718 U8.1 ; C31.1 149.587,18.811 v1(150.184,19.408) 150.194,19.399 151.692,19.399 C34.1 ; R1.2 154.879,16.546 v1(156.535,16.546) 156.813,16.269 C29.2 ; C33.2@162.755,10.091 162.851,9.995 v1(165.489,9.995) 165.508,10.013 165.825,10.013 167.233,11.422 167.333,11.422 C32.1 ; U9.2 171.438,14.697 171.438,16.499 v1(171.457,16.517) ; 173.288,23.397 173.31,23.376 ; R2.2 177.404,16.54 177.454,16.59 v1(177.48,16.59) 177.506,16.59 177.789,16.307 C30.2 ; 178.703,23.344 178.713,23.353
  Top Layer w2: 144.35,29.527 cw(c148.788,28.765) 153.292,28.765 ; 147.224,29.52 cw(c148.788,28.765) 150.525,28.765 ; 150.523,28.188 ccw(c154.694,28.188) 154.694,24.017 ; 153.29,28.188 ccw(c154.694,28.188) 154.743,26.784
  other v1: 60.96,0.8 66.04,0.8 111.76,0.8 116.84,0.8 60.96,1.8 66.04,1.8 111.76,1.8 116.84,1.8 27.724,17.514 27.724,18.517 81.052,18.507 27.724,19.517 81.052,19.507 30.488,20.507 81.052,20.507 83.711,20.507 27.724,20.517 144.529,20.946 146.794,20.946 27.724,21.517 28.994,21.517 30.488,21.507 81.052,21.507 82.322,21.507 83.711,21.507 98.925,22.16 100.195,22.16 101.465,22.16 125.368,22.16 126.638,22.16 127.908,22.16 10.474,22.175 11.744,22.175 13.014,22.175 144.529,22.216 146.794,22.216 44.789,22.265 46.059,22.265 47.329,22.265 1.27,23.517 5.08,23.517 7.62,23.517 15.24,23.517 17.78,23.517 20.32,23.517 22.86,23.517 38.1,23.517 40.64,23.517 43.18,23.517 50.8,23.517 53.34,23.517 55.88,23.517 58.42,23.517 60.96,23.517 63.5,23.517 66.04,23.517 68.58,23.517 71.12,23.517 73.66,23.517 76.2,23.517 78.74,23.517 88.9,23.517 91.44,23.517 93.98,23.517 96.52,23.517 104.14,23.517 106.68,23.517 109.22,23.517 111.76,23.517 114.3,23.517 116.84,23.517 119.38,23.517 121.92,23.517 129.54,23.517 132.08,23.517 134.62,23.517 137.16,23.517 139.7,23.517 142.24,23.517 154.986,23.515 157.48,23.517 160.02,23.517 162.56,23.517 165.1,23.517 167.64,23.517 170.18,23.517 172.72,23.517 175.26,23.517 177.8,23.517 180.34,23.517 182.88,23.517 185.42,23.517 189.23,23.517 152.065,23.671 30.074,24.225 30.924,24.225 83.286,24.225 84.136,24.225 154.961,24.482 1.27,24.517 2.54,24.517 3.81,24.517 5.08,24.517 6.35,24.517 7.62,24.517 8.89,24.517 15.24,24.517 16.51,24.517 17.78,24.517 19.05,24.517 20.32,24.517 21.59,24.517 22.86,24.517 24.13,24.517 25.4,24.517 26.67,24.517 34.29,24.517 35.56,24.517 36.83,24.517 38.1,24.517 39.37,24.517 40.64,24.517 41.91,24.517 43.18,24.517 49.53,24.517 50.8,24.517 52.07,24.517 53.34,24.517 54.61,24.517 55.88,24.517 57.15,24.517 58.42,24.517 59.69,24.517 60.96,24.517 62.23,24.517 63.5,24.517 64.77,24.517 66.04,24.517 67.31,24.517 68.58,24.517 69.85,24.517 71.12,24.517 72.39,24.517 73.66,24.517 74.93,24.517 76.2,24.517 77.47,24.517 78.74,24.517 80.01,24.517 87.63,24.517 88.9,24.517 90.17,24.517 91.44,24.517 92.71,24.517 93.98,24.517 95.25,24.517 96.52,24.517 102.87,24.517 104.14,24.517 105.41,24.517 106.68,24.517 107.95,24.517 109.22,24.517 110.49,24.517 111.76,24.517 113.03,24.517 114.3,24.517 115.57,24.517 116.84,24.517 118.11,24.517 119.38,24.517 120.65,24.517 121.92,24.517 123.19,24.517 129.54,24.517 130.81,24.517 132.08,24.517 133.35,24.517 134.62,24.517 135.89,24.517 137.16,24.517 138.43,24.517 139.7,24.517 140.97,24.517 142.24,24.517 156.21,24.517 157.48,24.517 158.75,24.517 160.02,24.517 161.29,24.517 162.56,24.517 163.83,24.517 165.1,24.517 166.37,24.517 167.64,24.517 168.91,24.517 170.18,24.517 171.45,24.517 172.72,24.517 173.99,24.517 175.26,24.517 176.53,24.517 177.8,24.517 179.07,24.517 180.34,24.517 181.61,24.517 182.88,24.517 184.15,24.517 185.42,24.517 186.69,24.517 187.96,24.517 189.23,24.517 153.665,24.571 11.31,24.725 12.16,24.725 45.613,24.725 46.463,24.725 99.738,24.725 100.588,24.725 126.182,24.725 127.032,24.725 144.52,24.75 146.32,24.75 149.96,24.959 152.567,25.023 30.074,25.075 30.924,25.075 83.286,25.075 84.136,25.075 11.31,25.575 12.16,25.575 45.613,25.575 46.463,25.575 99.738,25.575 100.588,25.575 126.182,25.575 127.032,25.575 151.667,25.838 1.27,26.283 2.54,26.283 3.81,26.283 5.08,26.283 6.35,26.283 7.62,26.283 8.89,26.283 15.24,26.283 16.51,26.283 17.78,26.283 19.05,26.283 20.32,26.283 21.59,26.283 22.86,26.283 24.13,26.283 25.4,26.283 26.67,26.283 34.29,26.283 35.56,26.283 36.83,26.283 38.1,26.283 39.37,26.283 40.64,26.283 41.91,26.283 43.18,26.283 49.53,26.283 50.8,26.283 52.07,26.283 53.34,26.283 54.61,26.283 55.88,26.283 57.15,26.283 58.42,26.283 59.69,26.283 60.96,26.283 62.23,26.283 63.5,26.283 64.77,26.283 66.04,26.283 67.31,26.283 68.58,26.283 69.85,26.283 71.12,26.283 72.39,26.283 73.66,26.283 74.93,26.283 76.2,26.283 77.47,26.283 78.74,26.283 80.01,26.283 86.36,26.283 87.63,26.283 88.9,26.283 90.17,26.283 91.44,26.283 92.71,26.283 93.98,26.283 95.25,26.283 96.52,26.283 102.87,26.283 104.14,26.283 105.41,26.283 106.68,26.283 107.95,26.283 109.22,26.283 110.49,26.283 111.76,26.283 113.03,26.283 114.3,26.283 115.57,26.283 116.84,26.283 118.11,26.283 119.38,26.283 120.65,26.283 121.92,26.283 123.19,26.283 129.54,26.283 130.81,26.283 132.08,26.283 133.35,26.283 134.62,26.283 135.89,26.283 137.16,26.283 138.43,26.283 139.7,26.283 140.97,26.283 142.24,26.283 156.21,26.283 157.48,26.283 158.75,26.283 160.02,26.283 161.29,26.283 162.56,26.283 163.83,26.283 165.1,26.283 166.37,26.283 167.64,26.283 168.91,26.283 170.18,26.283 171.45,26.283 172.72,26.283 173.99,26.283 175.26,26.283 176.53,26.283 177.8,26.283 179.07,26.283 180.34,26.283 181.61,26.283 182.88,26.283 184.15,26.283 185.42,26.283 186.69,26.283 187.96,26.283 189.23,26.283 154.949,26.317 144.52,26.55 146.32,26.55 153.7,26.633 151.112,26.948 1.27,27.283 5.08,27.283 7.62,27.283 15.24,27.283 17.78,27.283 20.32,27.283 22.86,27.283 25.4,27.283 27.94,27.283 30.48,27.283 33.02,27.283 35.56,27.283 38.1,27.283 40.64,27.283 43.18,27.283 50.8,27.283 53.34,27.283 55.88,27.283 58.42,27.283 60.96,27.283 63.5,27.283 66.04,27.283 68.58,27.283 71.12,27.283 73.66,27.283 76.2,27.283 78.74,27.283 81.28,27.283 83.82,27.283 86.36,27.283 88.9,27.283 91.44,27.283 93.98,27.283 96.52,27.283 104.14,27.283 106.68,27.283 109.22,27.283 111.76,27.283 114.3,27.283 116.84,27.283 119.38,27.283 121.92,27.283 129.54,27.283 132.08,27.283 134.62,27.283 137.16,27.283 139.7,27.283 142.24,27.283 157.48,27.283 160.02,27.283 162.56,27.283 165.1,27.283 167.64,27.283 170.18,27.283 172.72,27.283 175.26,27.283 177.8,27.283 180.34,27.283 182.88,27.283 185.42,27.283 189.23,27.283 154.973,27.304 149.556,27.417 152.842,27.478 150.983,28.169 10.045,28.283 12.7,28.283 44.362,28.307 47.017,28.307 98.471,28.293 101.126,28.293 124.807,28.293 127.462,28.293 152.737,28.695 153.752,28.999 146.476,29.092 10.045,29.283 12.7,29.283 98.471,29.293 101.126,29.293 124.807,29.293 127.462,29.293 44.362,29.307 47.017,29.307 150.882,29.403 148.71,29.427 145.182,29.974 146.867,30.083 152.436,30.139 12.7,30.283 47.017,30.307 101.126,30.293 127.462,30.293 150.29,30.495 147.854,30.854 149.19,31.029 145.905,31.253 151.653,31.599 145.091,32.152 152.468,32.164 147.139,32.171 150.163,32.397 148.644,32.623 148.68,33.834 111.76,49 116.84,49 60.96,49.1 66.04,49.1 111.76,50 116.84,50 60.96,50.1 66.04,50.1
LE: B3.1@92.785,10.034 X6.1 | length 13.6
  Top Layer w0.127: B3.1@92.785,10.034 92.785,7.26 92.934,7.111 98,7.111 X6.1@97.463,7.648 ; X6.1@96.31,6.574 99.627,6.574 99.633,6.58 X6.1@98.604,7.609
LE_B: B3.6@92.785,12.234 JP2.1 U4.2 | length 56.9
  Top Layer w0.127: JP2.1 83.477,9.173 83.551,9.247 83.551,10.757 83.625,10.831 100.598,10.831 100.673,10.905 100.673,15.194 100.598,15.268 92.785,15.268 ; U4.2 86.23,23.9 86.678,23.452 86.678,15.342 86.752,15.268 92.785,15.268 ; B3.6@92.785,12.234 92.785,15.268
LE_B_JP2: JP2.2 U2.2 | length 56.8
  Top Layer w0.127: U2.2 33.048,23.9 33.517,23.431 33.517,10.895 33.591,10.821 75.942,10.821 76.016,10.895 JP2.2@76.016,11.412
RFin: C4.1 X1.1
RFout: C28.2 X2.1
U1: C5.1 U1.16@13.635,25.4
U2: C18.1 U2.5
U3: C19.1 U3.16@47.938,25.4
U4: C20.1 U4.5
U5: C21.1 U5.16@102.063,25.4
U6_1: C28.1 U7.12 | length 14.2
  Top Layer w0.538: 145.67,28.765 cw(c148.79,28.765) 151.91,28.765 ; 151.906,28.188 ccw(c154.694,28.188) 154.694,25.4
U6_2: U7.29 U8.5
U7: C29.1 R1.1 U8.2 U9.3 | length 28
  Top Layer w0.254: U8.2 145.67,14.763 145.819,14.614 170.266,14.614 170.474,14.406 U9.3@170.499,14.406
U9: C36.1 U6.16@128.507,25.4